# EAGLE board PiPowerHat (EAGLE 7.4.0)
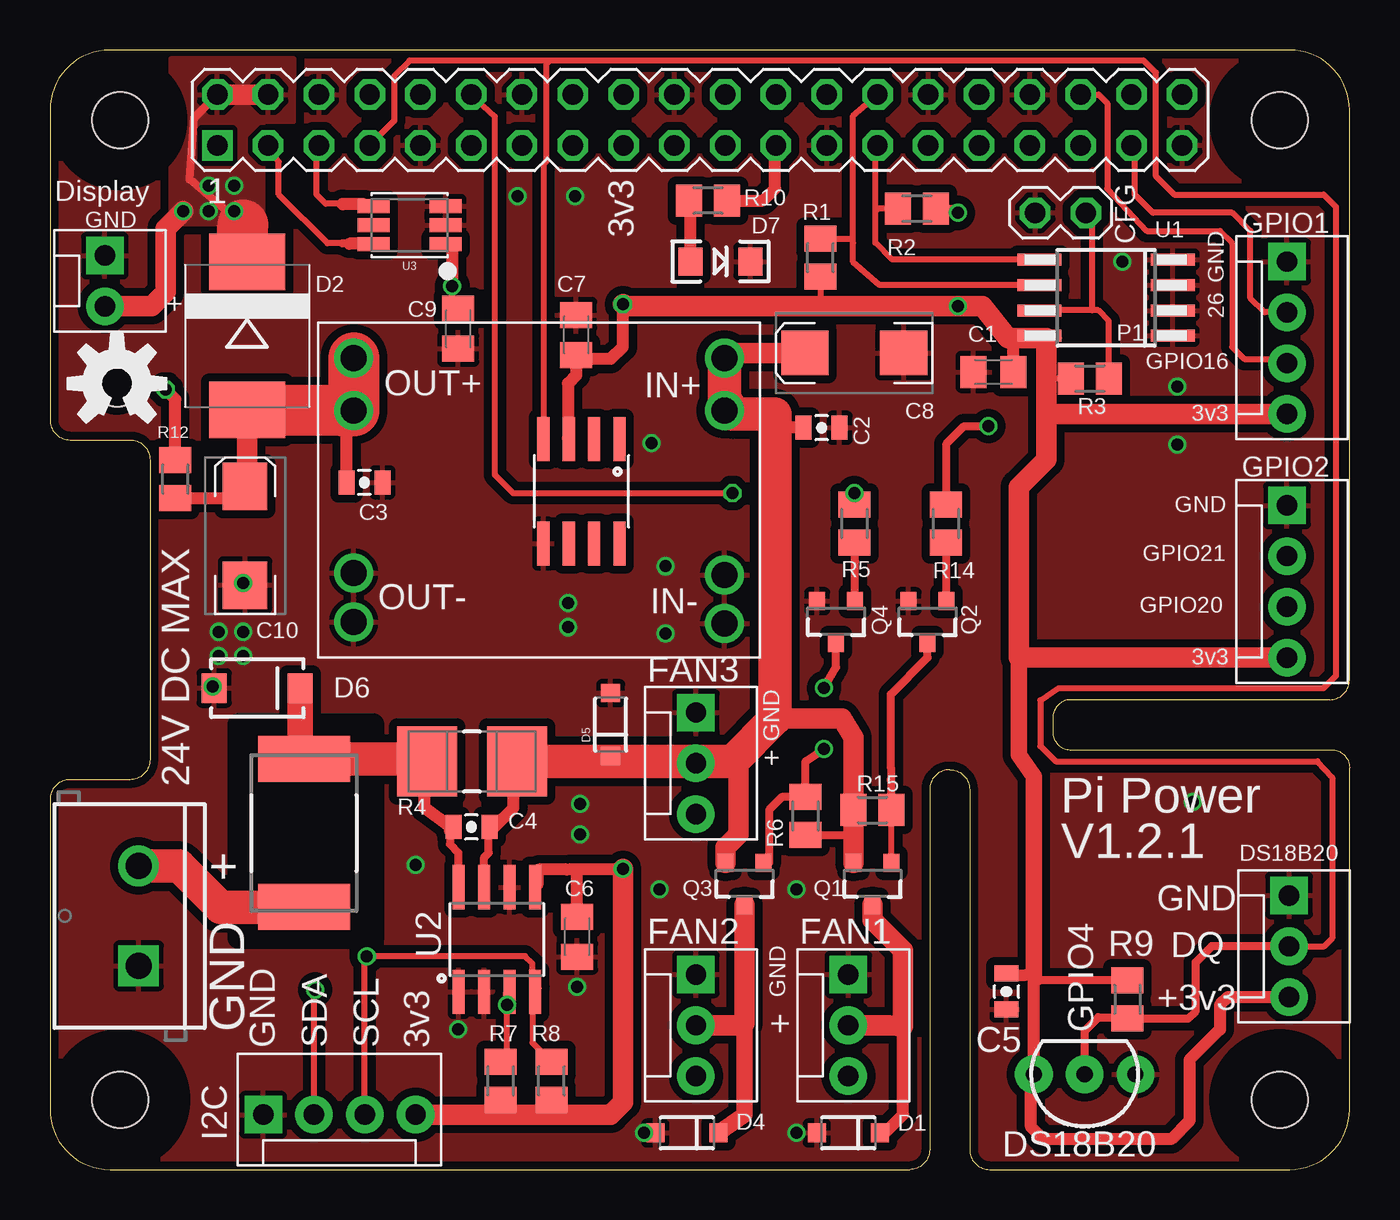
[diagram p0: board, top side]
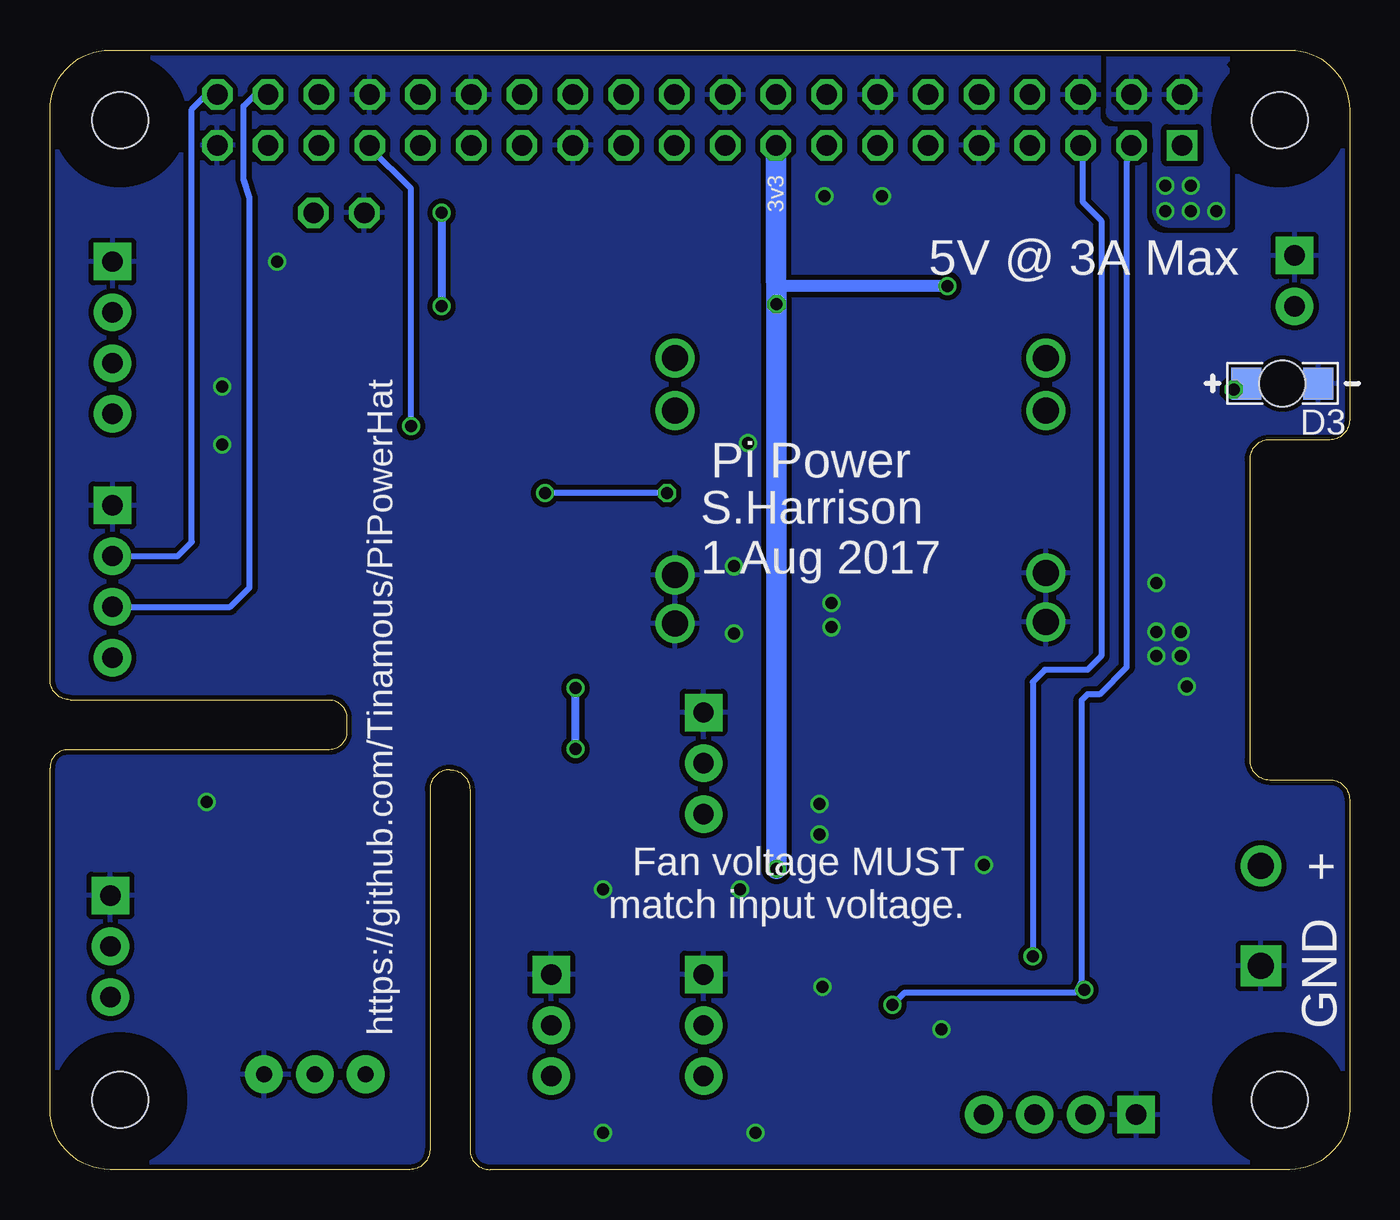
[diagram p1: board, bottom side, seen from below]

Size 65 x 56 mm. Coordinates in mm from the lower left corner, seen from the top.
Outline: 0,3 arc90 3,0 43,0 arc90 44,1 44,19 arc-90 45,20 arc-90 46,19 46,1 arc90 47,0 62,0 arc90 65,3 65,20.1 arc90 64.1,21 51.1,21 arc-90 50.16,21.81 50.16,22.64 arc-90 51.1,23.5 64,23.5 arc90 65,24.5 65,53 arc90 62,56 3,56 arc90 0,53 0,37.5 arc90 1,36.5 4,36.5 arc-90 5,35.5 5,20.5 arc-90 4,19.5 1,19.5 arc90 0,18.5 0,3
Copper layers (1*16): Top 0.035mm / dielectric 1.5mm / Bottom 0.035mm
Design rules "dirt_cheap_dirty_boards.v1": minimum track width 5mil, minimum drill 12mil, track to track 5mil, track to pad 5mil, pad to pad 5mil, via to via 5mil, smd to smd 0mil, copper to edge 10mil, drill to drill 10mil, minimum pad ring 10mil, minimum via ring 6mil, stop-mask expansion 2mil, vias tented up to drill 25mil, thermal gap 10mil
Holes 2.8 mm at 3.5,3.5 3.5,52.5 61.5,52.5 61.5,3.5
tRestrict: area 1.9,51 to 5,54; area 60,51 to 63,54; area 60,1.9 to 63,5; area 1.9,1.9 to 5,5; area 9.4,11.6 to 16.2,22.3
bRestrict: area 1.9,1.9 to 5,5; area 1.9,51 to 5,54; area 60,1.9 to 63,5; area 60,51 to 63,54

## Footprints (pad centres in the part's own frame; a part is rotated, then mirrored left to right if it is on the bottom)
C0805K = smd 1.3 x 1.6: 1 -1,0; 2 1,0
0805-CAP = smd 0.8 x 1.2: 1 -0.9,0; 2 0.9,0
EIA6032-NOM = smd 2.37 x 2.23: A 2.47,0; C -2.47,0
PIN_W_2 = drill 1.016 octagon: 1 0,0; 2 0,-2.54
SOD-123 = smd 0.9 x 0.95: A 1.575,0; C -1.575,0
SMC = smd 2.8 x 3.8: A 3.7,0; C -3.7,0
LED-1206-BOTTOM = smd 1.5 x 1.6: A -1.8,0; C 1.8,0 | hole 2.3: 0,0
SMA-DIODE = smd 1.27 x 1.47: A -2.15,0; C 2.15,0
LED-1206 = smd 1.2 x 1.4: A -1.5,0; C 1.5,0
SMD050F = smd 2.3 x 4.6: 1 -3.7,0; 2 3.7,0
SCREWTERMINAL-5MM-2 = drill 1.3 pad 2.032 square: 1 0,0 | drill 1.3 pad 2.032: 2 5,0
MOLEX-1X3 = drill 1.016 pad 1.88 square: 1 0,0 | drill 1.016 pad 1.88: 2 2.54,0; 3 5.08,0
MOLEX-1X4 = drill 1.016 pad 1.88 square: 1 0,0 | drill 1.016 pad 1.88: 2 2.54,0; 3 5.08,0; 4 7.62,0
MOLEX-1X2 = drill 1.016 pad 1.88 square: 1 0,0 | drill 1.016 pad 1.88: 2 2.54,0
PIN_20X2 = drill 1.016 square: 1 -24.13,-1.27 | drill 1.016 octagon: 2 -24.13,1.27; 3 -21.59,-1.27; 4 -21.59,1.27; 5 -19.05,-1.27; 6 -19.05,1.27; 7 -16.51,-1.27; 8 -16.51,1.27; 9 -13.97,-1.27; 10 -13.97,1.27; 11 -11.43,-1.27; 12 -11.43,1.27; 13 -8.89,-1.27; 14 -8.89,1.27; 15 -6.35,-1.27; 16 -6.35,1.27; 17 -3.81,-1.27; 18 -3.81,1.27; 19 -1.27,-1.27; 20 -1.27,1.27; 21 1.27,-1.27; 22 1.27,1.27; 23 3.81,-1.27; 24 3.81,1.27; 25 6.35,-1.27; 26 6.35,1.27; 27 8.89,-1.27; 28 8.89,1.27; 29 11.43,-1.27; 30 11.43,1.27; 31 13.97,-1.27; 32 13.97,1.27; 33 16.51,-1.27; 34 16.51,1.27; 35 19.05,-1.27; 36 19.05,1.27; 37 21.59,-1.27; 38 21.59,1.27; 39 24.13,-1.27; 40 24.13,1.27
SOT23-3 = smd 0.8 x 0.9: 1 -0.95,-1; 2 0.95,-1; 3 0,1.1
M0805 = smd 1.3 x 1.6: 1 -0.95,0; 2 0.95,0
2512 = smd 3 x 3.5: 1 -2.25,0; 2 2.25,0
MINI-BUCK-MODULE-3A = drill 1.3: GND@1 20.32,4.13; GND@2 20.32,1.7; GND@3 1.778,4.228; GND@4 1.778,1.778; IN@1 20.32,14.986; IN@2 20.32,12.356; OUT@1 1.778,14.986; OUT@2 1.778,12.356
SOIC8 = smd 0.6 x 2.2: 1 -1.905,-3.33; 2 -0.635,-3.33; 3 0.635,-3.33; 4 1.905,-3.33; 5 1.905,3.33; 6 0.635,3.33; 7 -0.635,3.33; 8 -1.905,3.33
SO08 = smd 0.61 x 2.21: 1 -1.905,-2.616; 2 -0.635,-2.616; 3 0.635,-2.616; 4 1.905,-2.616; 5 1.905,2.616; 6 0.635,2.616; 7 -0.635,2.616; 8 -1.905,2.616
TMB-6 = smd 1.6 x 0.7: 1 -1.8,0.95; 2 -1.8,0; 3 -1.8,-0.95; 4 1.8,-0.95; 5 1.8,0; 6 1.8,0.95
TO-92-AMMO = drill 0.813 pad 1.88: 1 -2.54,0; 2 0,0; 3 2.54,0
DS18B20_SOIC = smd 0.61 x 2.21: DQ 1.905,-2.616; GND 1.905,2.616; NC -1.905,-2.616; NC2 -0.635,-2.616; NC3 -1.905,2.616; NC4 -0.635,2.616; NC5 0.635,2.616; VCC 0.635,-2.616

## Placement (x,y rotation side)
C1  100nF  [C0805K]  47.19,39.89 180 top
C2  1.0uF 50v  [0805-CAP]  38.6,37.1 180 top
C3  1.0uF  [0805-CAP]  15.73,34.37 180 top
C4  1.0uF  [0805-CAP]  21.09,17.13 180 top
C5  1.0uF  [0805-CAP]  47.84,8.9 90 top
C6  100nF  [C0805K]  26.37,11.65 270 top
C7  100nF  [C0805K]  26.31,41.74 90 top
C8  10UF 35V  [EIA6032-NOM]  40.23,40.84 180 top
C9  100nF  [C0805K]  20.42,42.06 270 top
C10  100UF 10V  [EIA6032-NOM]  9.75,31.7 90 top
CFG  [PIN_W_2]  51.82,47.85 270 top
D1  [SOD-123]  39.93,1.83 180 top
D2  MBRS340T3G  [SMC]  9.86,41.7 270 top
D3  [LED-1206-BOTTOM]  3.35,39.32 0 bottom
D4  [SOD-123]  31.85,1.83 180 top
D5  [SOD-123]  28.04,22.25 90 top
D6  B340A  [SMA-DIODE]  10.36,24.08 0 top
D7  [LED-1206]  33.53,45.42 0 top
F1  SMD050F  [SMD050F]  12.7,16.83 90 top
J1  [SCREWTERMINAL-5MM-2]  4.43,10.19 90 top
J2  [MOLEX-1X3]  61.98,13.7 270 top
J3  FAN2  [MOLEX-1X3]  32.31,9.75 270 top
J4  FAN1  [MOLEX-1X3]  39.93,9.75 270 top
J5  I2C  [MOLEX-1X4]  10.67,2.74 0 top
J6  FAN3  [MOLEX-1X3]  32.31,22.86 270 top
JP1  GPIO2  [MOLEX-1X4]  61.87,33.22 270 top
JP3  Display  [MOLEX-1X2]  2.74,45.72 270 top
JP4  GPIO1  [MOLEX-1X4]  61.87,45.42 270 top
K1  PIN20X2  [PIN_20X2]  32.5,52.5 0 top
LOGO1  OSHW-LOGOM  [OSHW-LOGO-M]  3.35,39.32 0 top
Q1  NX2301P  [SOT23-3]  41.15,14.33 180 top
Q2  [SOT23-3]  43.89,27.43 180 top
Q3  NX2301P  [SOT23-3]  34.75,14.33 180 top
Q4  [SOT23-3]  39.32,27.43 180 top
R1  3k9  [M0805]  38.53,45.6 270 top
R2  3k9  [M0805]  43.36,48.05 0 top
R3  1k  [M0805]  52.01,39.56 180 top
R4  0.1  [2512]  21.1,20.41 180 top
R5  10k  [M0805]  40.23,32.31 90 top
R6  10k  [M0805]  37.8,17.68 270 top
R7  3k9  [M0805]  22.54,4.45 270 top
R8  3k9  [M0805]  25.08,4.45 270 top
R9  4k7  [M0805]  53.89,8.51 90 top
R10  1k5  [M0805]  32.92,48.46 0 top
R12  1k5  [M0805]  6.27,34.54 270 top
R14  10k  [M0805]  44.81,32.31 90 top
R15  10k  [M0805]  41.15,17.98 180 top
RG1  MINI-BUCK-MODULE-3A  [MINI-BUCK-MODULE-3A]  13.41,25.6 0 top
U1  EEPROM24  [SOIC8]  52.82,43.61 90 top
U2  INA219AIDCNRSOIC  [SO08]  22.35,11.51 0 top
U3  TSL2561T  [TMB-6]  17.98,47.24 180 top
U4  DS18B20  [TO-92-AMMO]  51.75,4.76 180 top
U5  DS1820SOIC  [DS18B20_SOIC]  26.58,33.92 180 top

## Library data of the parts
C1 C6 C7 C9 = resistor; DIELECTRIC: X7R
C2-C5 = SparkFun-Capacitors; PROD_ID: CAP-11625
C8 = SparkFun-Capacitors; FARNELL: 197634; PROD_ID: CAP-12984
C10 = SparkFun-Capacitors; FARNELL: 197180; PROD_ID: CAP-12984
CFG K1 = FLYFISH
D1 D4 D5 = SparkFun-DiscreteSemi
D2 = diode; FARNELL: 9557377
D3 D7 = SparkFun-LED
D6 = SparkFun-DiscreteSemi; PROD_ID: DIO-09886
F1 = switch-raychem; FARNELL: 1822231; FARNELL-NEW: 1822225
J1 = SparkFun-Connectors; STOREFRONT_ID: PRT-08432
J2-J6 JP1 JP3 JP4 = SparkFun-Connectors
LOGO1 = SparkFun-Aesthetics
Q1 Q3 = SparkFun-DiscreteSemi; PROD_ID: TRANS-08285
Q2 Q4 = SparkFun-DiscreteSemi; PROD_ID: TRANS-08049
R1-R3 R5-R10 R12 R14 R15 = resistor; TOLERANCE: 5%
R4 = SparkFun-Resistors; PROD_ID: RES-12449
RG1 = Tinamous
U1 = FLYFISH; FARNELL: 2463718
U2 = INA219AIDCNR
U3 = SparkFun-Sensors
U4 = SparkFun-Sensors; STORE_ID: SEN-00245
U5 = DS1820-SOIC

## Nets
+3V3: C1.1 C5.2 C6.1 C7.1 C9.1 J2.3 J5.4 JP1.4 JP4.4 K1.17 R1.2 R2.2 R3.2 R7.2 R8.2 R9.2 U1.8 U2.5 U3.1 U4.3 U5.VCC
+5V: C3.2 C10.A D2.A R12.2 RG1.OUT@1 RG1.OUT@2
DC_IN: F1.1 J1.2
FAN1_PWM: K1.33 R14.2
FAN2_PWM: K1.12 R5.2
GND: C1.2 C2.1 C3.1 C5.1 C6.2 C7.2 C8.C C9.2 C10.C CFG.2 D1.A D3.C D4.A D5.A D6.A D7.C J1.1 J2.1 J3.1 J4.1 J5.1 J6.1 JP1.1 JP3.1 JP4.1 K1.6 K1.9 K1.14 K1.20 K1.25 K1.30 K1.34 K1.39 Q2.2 Q4.2 RG1.GND@1 RG1.GND@2 RG1.GND@3 RG1.GND@4 U1.1 U1.2 U1.3 U1.4 U2.1 U2.2 U2.6 U3.2 U3.3 U4.1 U5.GND
GPIO11: K1.23 R10.2
GPIO16: JP4.3 K1.36
GPIO20: JP1.3 K1.38
GPIO21: JP1.2 K1.40
GPIO26: JP4.2 K1.37
ID_SC: K1.28 R1.1 U1.6
ID_SD: K1.27 R2.1 U1.5
N$1: D4.C J3.2 Q3.3
N$2: Q4.1 R5.1
N$3: CFG.1 R3.1 U1.7
N$4: D3.A R12.1
N$5: C4.2 D6.C F1.2 R4.2 U2.8
N$6: Q3.1 Q4.3 R6.1
N$7: D1.C J4.2 Q1.3
N$8: Q1.1 Q2.3 R15.1
N$9: D7.A R10.1
N$13: Q2.1 R14.1
PI_5V: D2.C JP3.2 K1.2 K1.4
SCL: J5.3 K1.5 R8.1 U2.4 U3.4
SDA: J5.2 K1.3 R7.1 U2.3 U3.6
TEMPERATURE: J2.2 K1.7 R9.1 U4.2 U5.DQ
VIN: C2.2 C4.1 C8.A D5.C J6.2 Q1.2 Q3.2 R4.1 R6.2 R15.2 RG1.IN@1 RG1.IN@2 U2.7

## Tracks (layer width: path | path; a pad name or v marks a point on that pad's centre or on a via)
+3V3  (via drill 0.6)
  Top 0.305: R1.2 38.53,43.38 38.73,43.18 | 50.48,41.59 49.85,41.59 49.6,41.59 U1.8 | 22.44,3.6 R7.2 | R3.2 49.91,39.56 49.85,39.01 | C9.1 20.42,42.98 20.12,43.59 v20.12,44.2
  Top 0.406: 49.28,11.82 49.21,14.33 | R2.2 45.21,48.05 v45.41,47.85 | R7.2 22.54,2.76 22.55,2.74 | R8.2 25.08,2.83 24.99,2.74 | R9.2 49.51,9.46 49.21,9.75
  Top 0.61: C1.1 48.19,41.52 47.9,41.59 | C5.2 48.35,9.7 49.21,9.75 U4.3 49.07,4.62 49.07,2.13 49.68,1.52 56.08,1.52 57,2.44 57,5.49 58.52,7.01 58.52,8.23 58.91,8.62 J2.3 | 25.95,37.53 U5.VCC 25.91,36.58 25.91,39.32 26.31,39.73 C7.1 26.52,40.54 28.04,40.54 28.65,41.15 v28.65,43.28 | U3.1 19.85,46.29 20.12,46.02 v20.12,44.2 | 49.21,14.33 49.21,13.87 49.3,13.78 | 26.52,15.04 26.02,15.04 25.84,15.01 24.46,15.01 24.38,14.94 24.38,14.25 U2.5 | 26.52,15.04 28.55,15.04 28.65,14.63 | C6.1 26.36,14.88 26.52,15.04
  Top 0.813: 49.85,41.59 47.9,41.59 | 49.21,9.75 49.21,14.33 49.21,19.67 48.46,20.73 48.46,25.6
  Top 1.016: 49.85,41.59 49.85,39.01 49.85,37.8 | 49.85,37.8 49.85,35.81 49.84,35.51 48.46,34.13 48.46,25.6 JP1.4 | 49.6,41.59 47.9,41.59 46.63,43.18 v45.41,43.18 38.73,43.18 28.75,43.18 v28.65,43.28 | JP4.4 49.85,37.8 | J5.4 22.55,2.74 24.99,2.74 28.04,2.74 28.65,3.35 28.65,14.63 v28.65,15.04
  Bottom 0.406: v45.41,47.85 v45.41,43.18
  Bottom 0.61: v20.12,44.2 28.65,44.2
  Bottom 1.016: v28.65,15.04 v28.65,43.28 28.65,44.2 28.69,44.54 K1.17
+5V
  Top 0.61: 16.07,37.62 RG1.OUT@2 | C3.2 14.83,37.76 14.63,37.96 | R12.2 9.69,33.59 9.75,33.53 C10.A
  Top 1.016: C10.A 9.86,34.17 D2.A
  Top 1.676: 9.84,37.98 D2.A 9.9,37.96
  Top 2.54: RG1.OUT@1 RG1.OUT@2 14.63,37.96 9.9,37.96
DC_IN
  Top 1.27: 12.5,12.92 F1.1
  Top 1.676: J1.2 6.46,15.19 8.53,13.11 12.68,13.11 F1.1
  Top 1.778: 12.49,13.34 F1.1
FAN1_PWM  (via drill 0.6)
  Top 0.305: 44.84,33.22 R14.2
  Top 0.406: 44.84,33.22 44.84,36.31 45.72,37.19 v46.94,37.19
  Bottom 0.305: v46.94,37.19 46.94,49.07 49.07,51.17 K1.33
FAN2_PWM  (via drill 0.6)
  Top 0.305: K1.12 22.25,52.66 22.25,34.75 23.16,33.83 v34.14,33.83 | R5.2 v40.23,33.83
  Bottom 0.305: v34.14,33.83 v40.23,33.83
GND  (via drill 0.6)
  other vias: 9.66,29.34 26.26,48.69 57.16,18.39 26.37,9.14 20.42,7.01 37.34,14.02 29.72,1.83 37.34,1.83 25.91,28.35 25.91,27.13 26.52,18.29 26.52,16.76 53.64,45.42 30.48,14.02 56.39,39.17 56.39,36.27 30.78,26.82 30.78,30.18 9.66,26.9 8.45,26.9 8.45,25.68 9.66,25.68 8.14,24.16 18.29,15.24 30.09,36.35 23.38,48.69
  pour Bottom (isolate 0.254, rank 6): 0,3 arc90 3,0 43,0 arc90 44,1 44,19 arc-90 45,20 arc-90 46,19 46,1 arc90 47,0 62,0 arc90 65,3 65,53 arc90 62,56 3,56 arc90 0,53 0,37.5 arc90 1,36.5 4,36.5 arc-90 5,35.5 5,20.5 arc-90 4,19.5 1,19.5 arc90 0,18.5
  pour Top (isolate 0.406, rank 5): 0,3 arc90 3,0 43,0 arc90 44,1 44,19 arc-90 45,20 arc-90 46,19 46,1 arc90 47,0 62,0 arc90 65,3 65,53 arc90 62,56 3,56 arc90 0,53 0,37.5 arc90 1,36.5 4,36.5 arc-90 5,35.5 5,20.5 arc-90 4,19.5 1,19.5 arc90 0,18.5
GPIO11
  Top 0.61: R10.2 35.66,48.46 36.27,49.07 36.27,51.19 K1.23
GPIO16
  Top 0.305: K1.36 52.45,53.77 52.88,53.34 52.88,49.07 54.86,46.94 58.52,46.94 59.13,46.33 59.13,41.15 59.74,40.54 61.77,40.54 JP4.3
GPIO20
  Bottom 0.305: K1.38 54.06,53.8 54.71,53.8 55.32,53.19 55.32,49.53 55.02,48.62 55.02,29.11 55.98,28.14 JP1.3
GPIO21
  Bottom 0.305: K1.40 56.76,53.65 57.3,53.65 57.91,53.03 57.91,31.39 58.62,30.68 JP1.2
GPIO26
  Top 0.305: JP4.2 60.76,42.88 60.05,43.59 60.05,46.94 59.13,47.85 55.17,47.85 54.25,48.77 54.25,51.07 K1.37
ID_SC
  Top 0.305: U1.6 41.48,44.24 40.17,45.39 40.17,46.35 | 40.17,46.35 40.17,52.7 K1.28 | R1.1 40.06,46.56 40.17,46.35
ID_SD
  Top 0.305: U1.5 42.12,45.52 41.27,46.35 41.27,47.94 | 41.27,47.94 41.27,51.12 K1.27 | R2.1 41.39,48.05 41.27,47.94
N$1
  Top 0.813: D4.C 34.75,2.74 34.75,7.32 34.65,7.21
  Top 1.016: 34.75,7.32 Q3.3 | J3.2 34.65,7.21
N$2
  Top 0.406: Q4.1 40.27,30.41 R5.1
N$3
  Top 0.305: R3.1 52.96,42.45 52.43,42.98 52.12,42.98 | 52.12,42.98 50.19,42.98 | CFG.1 51.98,47.38 52.12,47.24 52.12,42.98
  Top 0.406: U1.7 50.19,42.98
N$4  (via drill 0.6)
  Top 0.61: R12.1 6.27,38.53 v5.79,39.01
  Bottom 0.61: v5.79,39.01 5.79,38.99 D3.A
N$5
  Top 0.406: 20,16.95 20,16.27 20.42,15.85 20.42,14.14 U2.8
  Top 0.61: R4.2 18.73,20.29 18.73,18.1 20.02,17.13 C4.2 20,16.95
  Top 1.27: D6.C 12.51,20.71 F1.2
  Top 1.676: F1.2 18.18,20.53 R4.2
N$6  (via drill 0.6)
  Top 0.406: Q3.1 35.97,15.36 35.97,17.98 36.61,18.63 R6.1 37.8,20.42 v38.71,21.03 | v38.71,24.08 39.32,25.11 Q4.3
  Bottom 0.406: v38.71,21.03 v38.71,24.08
N$7
  Top 0.61: D1.C 41.76,1.83 42.67,2.74 42.67,7.26 41.96,7.21
  Top 1.016: Q1.3 41.15,12.5 42.67,10.97 42.67,7.26 42.67,7.16 41.96,7.21 J4.2
N$8
  Top 0.305: Q1.1 R15.1
  Top 0.406: R15.1 42.06,19.51 42.06,20.12 42.06,23.77 43.89,25.6 Q2.3
N$9
  Top 0.61: D7.A 32.03,48.4 R10.1
N$13
  Top 0.305: 44.81,28.47 Q2.1
  Top 0.406: R14.1 44.81,28.47
PI_5V  (via drill 0.6)
  Top 0.406: 9.64,47.24 6.99,49.53 7.2,52.6 K1.2
  Top 1.016: D2.C 9.64,45.72 | K1.2 K1.4 | JP3.2 5.08,43.18 5.79,43.89 5.79,47.07 v6.67,47.94
  Top 2.54: 9.64,45.72 9.64,47.24
  other vias: 9.21,49.21 9.21,47.94 7.94,49.21 7.94,47.94
  pour Top (isolate 0.254): 6.03,55.56 6.03,47.31 10.67,47.31 10.67,52.43 12.19,52.43 12.22,55.56
  pour Bottom (isolate 0.305, rank 3): 6.35,55.88 11.75,55.88 arc-90 12.06,55.56 12.06,53.02 arc-90 11.75,52.55 10.03,52.55 arc90 9.75,52.27 9.75,48.01 arc-90 8.99,47.24 6.25,47.24 arc-90 6.1,47.4 6.1,54.36 arc-90 6.35,55.24 6.03,55.56
SCL  (via drill 0.6)
  Top 0.305: 24.45,9.08 U2.4 | 24.13,8.76 U2.4 | 24.13,8.76 24.13,6.35 R8.1 | U3.4 15.73,48.28 | 14.63,48.31 13.79,48.31 13.34,48.77 13.34,51.12 K1.5 | 24.13,8.76 24.13,10.31 23.77,10.67 v15.85,10.67 15.75,10.26 J5.3
  Top 0.406: U2.4
  Top 0.61: 15.73,48.28 14.66,48.28 14.63,48.31
  Bottom 0.305: K1.5 13.34,50.8 13.34,48.39 12.42,47.47 12.42,25.68 13.11,24.99 15.24,24.99 15.85,24.38 v15.85,10.67
SDA  (via drill 0.6)
  Top 0.305: 22.86,9.01 U2.3 22.98,9.69 22.86,9.56 v22.86,8.23 | v22.86,8.23 22.86,5.71 R7.1 | v22.86,8.23 22.86,8.76 | U3.6 15.57,46.3 | 14.63,46.33 13.88,46.33 11.44,48.77 11.44,50.39 K1.3 | J5.2 13.21,8.64 v13.26,8.99
  Top 0.406: 22.86,8.76 U2.3 | 14.96,46.3 14.63,46.33
  Top 0.61: 15.57,46.3 14.96,46.3
  Bottom 0.305: K1.3 11.14,50.39 11.14,25.13 12.5,23.77 13.11,23.77 13.41,23.47 13.41,9.45 | 13.41,9.45 13.72,8.84 22.25,8.84 v22.86,8.23 | 13.41,9.45 13.41,9.14 v13.26,8.99
TEMPERATURE
  Top 0.305: 24.99,55.47 54.71,55.47 55.32,54.86 55.32,49.68 56.24,48.77 63.7,48.77 64.31,48.16 64.31,24.69 63.7,24.08 50.44,24.08 49.53,23.47 49.53,21.18 50.3,20.42 63.4,20.42 64.14,19.62 64.14,11.56 63.74,11.16 J2.2 | 24.99,55.47 17.98,55.47 17.22,54.71 17.22,52.46 K1.7 | U5.DQ 24.69,38.38 24.69,50.29 24.84,50.44 24.84,55.32 24.99,55.47
  Top 0.406: U4.2 51.75,6.95 52.43,7.62 53.83,7.62 R9.1 56.94,7.56 57.3,7.92 57.3,10.36 57.76,10.82 57.91,10.97 58.1,11.16 J2.2
VIN
  Top 0.406: U2.7 21.71,15.62 21.95,15.85 21.95,17.09 C4.1 | R15.2 40.2,16.46 | 40.2,16.46 40.2,15.54 | R6.2 39.93,16.73 40.2,16.46 | D5.C 32.26,20.37 J6.2
  Top 0.61: 21.7,14.13 U2.7 | R4.1 23.18,20.23 23.18,18.1 22.21,17.13 C4.1 21.91,17.05 | 33.63,40.64 33.83,39.52 34.14,39.22 | 33.83,38.61 33.73,38.71 | C2.2 36.35,37.1 36.27,37.19
  Top 0.813: 33.83,39.52 33.73,39.62 | 31.36,20.39 30.79,20.42 | 40.2,15.54 Q1.2 | 30.18,20.12 29.87,20.42
  Top 1.016: Q1.2 40.2,16.46 40.2,21.61 39.62,22.55 36.27,22.55 | Q3.2 33.8,16.12 34.44,16.76 34.44,20.12 34.14,20.42 | C8.A 33.98,40.84 RG1.IN@1
  Top 1.27: 34.14,38.3 33.83,38.61 | J6.2 30.28,20.32 30.18,20.42
  Top 1.676: 23.58,20.64 23.37,20.42 | 34.18,37.8 36.27,37.8 36.27,37.19 36.27,22.55 34.14,20.42 30.79,20.42 30.18,20.42 29.87,20.42 23.37,20.42 | 34.14,37.8 34.18,37.8 | 34.18,37.8 RG1.IN@2 33.73,38.71 33.73,39.62 RG1.IN@1 | 23.37,20.42 R4.1

## Text on the board
tNames: 3v3 | Display | GPIO1 | GND | GND | 26 | + | P1 | GPIO16 | 3v3 | GPIO2 | GND | GPIO21 | GPIO20 | 3v3 | FAN3 | GND | + | 24V DC MAX | Pi Power | V1.2.1 | DS18B20 | + | GND | GND | GPIO4 | DQ | FAN2 | GND | FAN1 | +3v3 | + | GND | SDA | SCL | 3v3 | I2C | DS18B20
bNames: 3v3 | 5V @ 3A Max | Pi Power | S.Harrison / 1 Aug 2017 | Fan voltage MUST / match input voltage. | + | GND | https://github.com/Tinamous/PiPowerHat